# EAGLE board RAUPS_SingleLayer_Stepper (EAGLE 7.2.0)
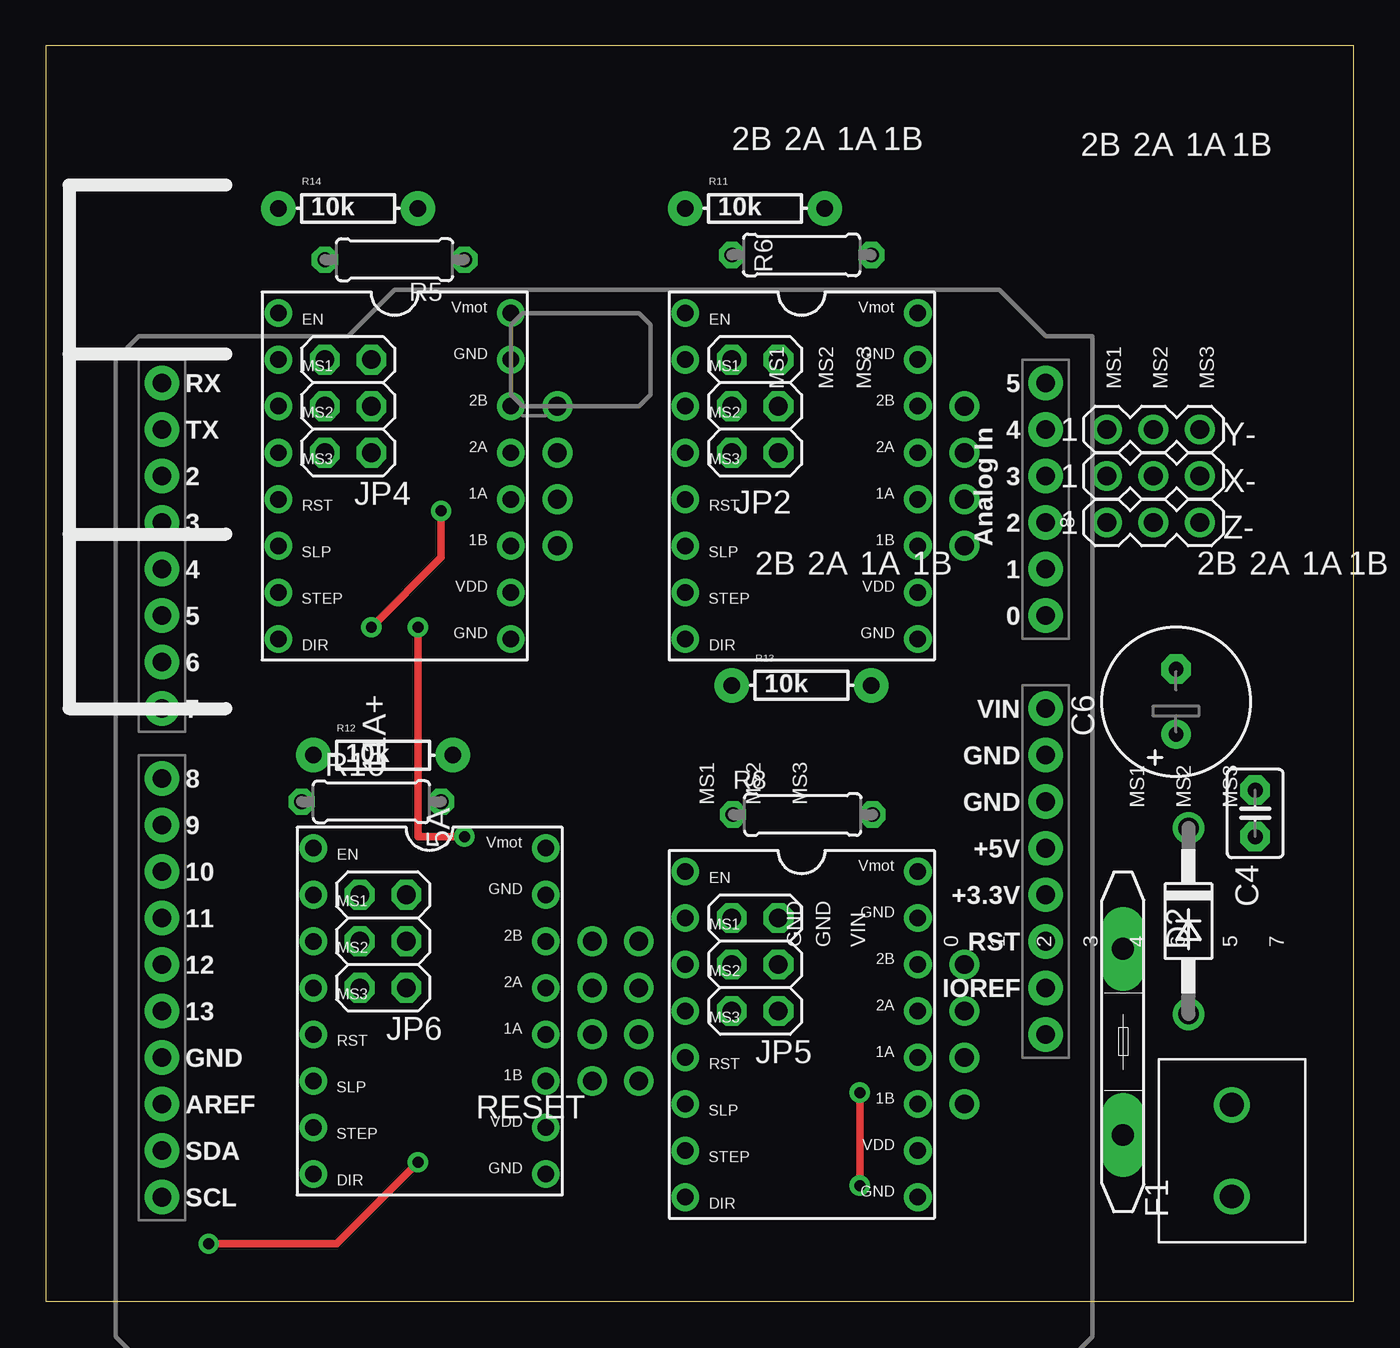
[diagram p0: board, top side]
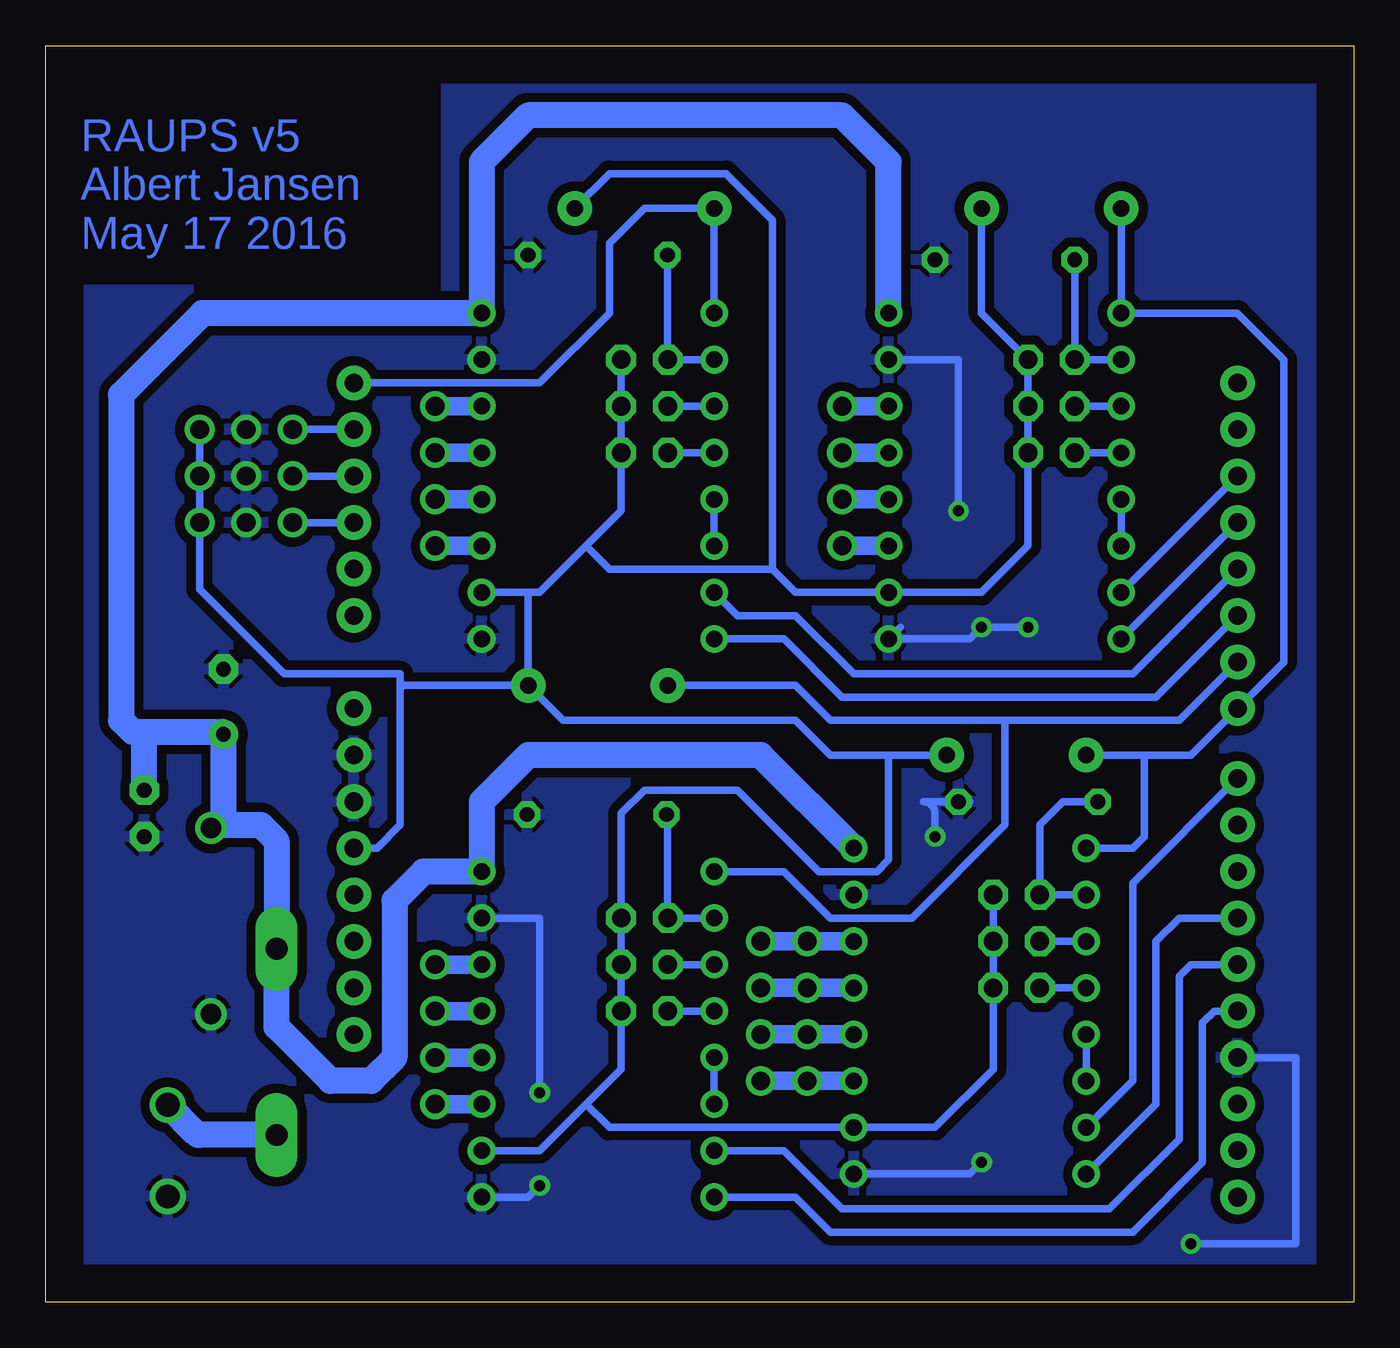
[diagram p1: board, bottom side, seen from below]

Size 71.42 x 68.57 mm. Coordinates in mm from the lower left corner, seen from the top.
Outline: 71.42,0 71.42,68.57 0,68.57 0,0 71.42,0
Copper layers (1*16): Top 0.035mm / dielectric 1.5mm / Bottom 0.035mm
Design rules "Humber Safe DRU": minimum track width 10mil, minimum drill 20mil, track to track 20mil, track to pad 20mil, pad to pad 8mil, via to via 8mil, smd to smd 8mil, copper to edge 80mil, drill to drill 8mil, minimum pad ring 12mil, minimum via ring 10mil, stop-mask expansion 4mil, vias tented up to drill 25mil, thermal gap 10mil
Net classes: 0 default: width 0.406 mm

## Footprints (pad centres in the part's own frame; a part is rotated, then mirrored left to right if it is on the bottom)
C2.5-3 = drill 0.813 pad 1.6 octagon: 1 -1.27,0; 2 1.27,0
E3,5-8 = drill 0.813 pad 1.6: + -1.778,0 | drill 0.813 pad 1.6 octagon: - 1.778,0
DO41-10 = drill 1.118: A 5.08,0; C -5.08,0
1X04 = drill 1.016: 1 -2.54,0; 2 0,0; 3 2.54,0; 4 5.08,0
MFR500 = drill 1.2 pad 2.3 long: 1 -5.08,0; 2 5.08,0
2X03 = drill 1.016 octagon: 1 -2.54,-1.27; 2 -2.54,1.27; 3 0,-1.27; 4 0,1.27; 5 2.54,-1.27; 6 2.54,1.27
0207/7 = drill 0.813 octagon: 1 -3.81,0; 2 3.81,0
AXIAL-0.3 = drill 0.9 pad 1.88: P$1 -3.81,0; P$2 3.81,0
CONN-2PIN = drill 1.3: P$1 -2.5,0; P$2 2.5,0
A4988BREAKOUT = drill 0.9: 1A 8.89,1.27; 1B 11.43,1.27; 2A 6.35,1.27; 2B 3.81,1.27; DIR 16.51,-11.43; EN -1.27,-11.43; GND 16.51,1.27; GND@0 1.27,1.27; MS1 1.27,-11.43; MS2 3.81,-11.43; MS3 6.35,-11.43; RST 8.89,-11.43; SLP 11.43,-11.43; STEP 13.97,-11.43; VDD 13.97,1.27; VMOT -1.27,1.27
UNO_R3_SHIELD = drill 1.016 pad 1.88: 3.3V 50.8,26.67; 5V 50.8,29.21; A0 50.8,41.91; A1 50.8,44.45; A2 50.8,46.99; A3 50.8,49.53; A4 50.8,52.07; A5 50.8,54.61; AREF 2.54,15.24; D2 2.54,49.53; D3 2.54,46.99; D4 2.54,44.45; D5 2.54,41.91; D6 2.54,39.37; D7 2.54,36.83; D8 2.54,33.02; D9 2.54,30.48; D10 2.54,27.94; D11 2.54,25.4; D12 2.54,22.86; D13 2.54,20.32; GND@0 50.8,31.75; GND@1 50.8,34.29; GND@2 2.54,17.78; IOREF 50.8,21.59; NC 50.8,19.05; RES 50.8,24.13; RX 2.54,54.61; SCL 2.54,10.16; SDA 2.54,12.7; TX 2.54,52.07; VIN 50.8,36.83
3PIN-HEADER = drill 1.016: 1 -2.54,0; 2 0,0; 3 2.54,0

## Placement (x,y rotation side)
C4  100nF  [C2.5-3]  66.04,26.67 270 top
C6  470uF  [E3,5-8]  61.72,32.77 90 top
D2  1N4004  [DO41-10]  62.4,20.78 270 top
E0-MOT  [1X04]  50.17,46.36 270 top
F1  MFR500  [MFR500]  58.83,14.19 270 top
JP2  [2X03]  38.73,48.9 270 top
JP4  [2X03]  16.51,48.9 270 top
JP5  [2X03]  38.73,18.41 270 top
JP6  [2X03]  18.41,19.68 270 top
R5  100k  [0207/7]  19.05,56.9 0 top
R6  100k  [0207/7]  41.27,57.15 180 top
R8  100k  [0207/7]  41.34,26.61 0 top
R10  100k  [0207/7]  17.78,27.3 0 top
R11  10k  [AXIAL-0.3]  38.73,59.69 0 top
R12  10k  [AXIAL-0.3]  18.41,29.84 0 top
R13  10k  [AXIAL-0.3]  41.27,33.66 0 top
R14  10k  [AXIAL-0.3]  16.51,59.69 0 top
U$1  2PIN_SOCKET  [CONN-2PIN]  64.77,8.26 270 top
U$4  A4988BREAKOUT  [A4988BREAKOUT]  46.35,52.7 270 top
U$6  A4988BREAKOUT  [A4988BREAKOUT]  24.13,52.7 270 top
U$7  A4988BREAKOUT  [A4988BREAKOUT]  46.35,22.23 270 top
U$8  A4988BREAKOUT  [A4988BREAKOUT]  26.04,23.5 270 top
U$11  ARDUINO_R3_SHIELD  [UNO_R3_SHIELD]  3.81,-4.45 0 top
X-  [3PIN-HEADER]  60.48,45.09 0 top
X-MOT  [1X04]  27.94,46.35 270 top
Y-  [3PIN-HEADER]  60.48,47.62 0 top
Y-MOT  [1X04]  50.16,15.88 270 top
Z-  [3PIN-HEADER]  60.48,42.55 0 top
Z-MOT  [1X04]  32.38,17.14 270 top
Z-MOT1  [1X04]  29.84,17.14 270 top

## Library data of the parts
C4 = capacitor-wima
C6 R5 R6 R8 R10 = adafruit
D2 = diode
E0-MOT F1 U$4 U$6-U$8 X-MOT Y-MOT Z-MOT Z-MOT1 = RepRapjr
JP2 JP4-JP6 = pinhead
R11-R14 = SparkFun-Resistors; PROD_ID: RES-12183
U$1 = ControllerCard
U$11 = SparkFun-Boards
X- Y- Z- = ultimachine

## Nets
+12V: C4.1 C6.+ D2.C F1.1 U$4.VMOT U$6.VMOT U$7.VMOT U$8.VMOT
D9: U$11.D10
D10: U$11.D9
E0-DIR: U$4.DIR U$11.D5
E0-EN: R11.P$1 U$4.EN U$11.A5
E0-STEP: U$4.STEP U$11.D4
GND: C4.2 C6.- D2.A R5.2 R6.1 R8.2 R10.2 U$1.P$2 U$4.GND U$4.GND@0 U$6.GND U$6.GND@0 U$7.GND U$7.GND@0 U$8.GND U$8.GND@0 U$11.GND@0 U$11.GND@1 U$11.GND@2 X-.2 Y-.2 Z-.2
N$3: E0-MOT.1 U$4.2B
N$4: E0-MOT.2 U$4.2A
N$5: JP2.1 R6.2 U$4.MS1
N$6: JP2.5 U$4.MS3
N$8: U$4.RST U$4.SLP
N$9: JP2.3 U$4.MS2
N$10: E0-MOT.3 U$4.1A
N$11: E0-MOT.4 U$4.1B
N$12: U$11.IOREF
N$14: JP4.1 R5.1 U$6.MS1
N$15: JP4.3 U$6.MS2
N$16: U$11.VIN
N$17: JP5.3 U$7.MS2
N$19: JP4.5 U$6.MS3
N$20: U$6.RST U$6.SLP
N$21: U$6.2B X-MOT.1
N$22: U$6.2A X-MOT.2
N$23: U$7.RST U$7.SLP
N$24: U$11.3.3V
N$25: U$11.AREF
N$26: U$6.1A X-MOT.3
N$27: U$6.1B X-MOT.4
N$28: U$7.2B Y-MOT.1
N$29: U$7.2A Y-MOT.2
N$30: U$7.1A Y-MOT.3
N$31: JP5.5 U$7.MS3
N$32: F1.2 U$1.P$1
N$33: JP5.1 R8.1 U$7.MS1
N$36: U$7.1B Y-MOT.4
N$37: JP6.3 U$8.MS2
N$38: U$8.RST U$8.SLP
N$39: JP6.5 U$8.MS3
N$40: JP6.1 R10.1 U$8.MS1
N$41: U$8.2B Z-MOT1.1 Z-MOT.1
N$42: U$8.2A Z-MOT1.2 Z-MOT.2
N$43: U$8.1A Z-MOT1.3 Z-MOT.3
N$44: U$8.1B Z-MOT1.4 Z-MOT.4
RESET: U$11.RES
THERM0: U$11.A1
THERM1: U$11.A0
VCC: JP2.2 JP2.4 JP2.6 JP4.2 JP4.4 JP4.6 JP5.2 JP5.4 JP5.6 JP6.2 JP6.4 JP6.6 R11.P$2 R12.P$2 R13.P$2 R14.P$2 U$4.VDD U$6.VDD U$7.VDD U$8.VDD U$11.5V X-.3 Y-.3 Z-.3
X-DIR: U$6.DIR U$11.D3
X-EN: R12.P$1 R14.P$1 U$6.EN U$8.EN U$11.D7
X-MIN: U$11.A3 X-.1
X-STEP: U$6.STEP U$11.D2
Y-DIR: U$7.DIR U$11.D13
Y-EN: R13.P$1 U$7.EN U$11.D6
Y-MIN: U$11.A4 Y-.1
Y-STEP: U$7.STEP U$11.D12
Z-DIR: U$8.DIR U$11.D11
Z-MIN: U$11.A2 Z-.1
Z-STEP: U$8.STEP U$11.D8

## Tracks (layer width: path | path; a pad name or v marks a point on that pad's centre or on a via)
+12V
  Bottom 1.422: U$6.VMOT 25.4,62.23 27.94,64.77 45.09,64.77 47.62,62.23 U$4.VMOT 62.87,53.98 67.31,49.53 67.31,31.75 66.67,31.11 66.04,31.11 | D2.C 62.23,26.04 | 62.23,26.04 59.69,26.04 58.83,25.17 F1.1 58.83,15.01 55.88,12.06 53.66,12.06 52.39,13.34 52.39,21.91 50.8,23.5 U$7.VMOT 47.62,27.3 45.09,29.84 32.38,29.84 U$8.VMOT | 66.04,31.11 61.85,31.11 arc90 C6.+ 61.72,26.54 62.23,26.04 | C4.1 66.04,31.11
E0-DIR
  Bottom 0.406: U$11.D5 10.79,33.02 27.94,33.02 31.11,36.2 U$4.DIR
E0-EN
  Bottom 0.406: U$4.EN R11.P$1 38.73,59.69 40.64,57.78 40.64,53.98 44.45,50.16 U$11.A5
E0-STEP
  Bottom 0.406: U$11.D4 12.06,34.29 27.3,34.29 30.48,37.47 33.66,37.47 U$4.STEP
GND  (via drill 0.6)
  Top 0.406: v17.78,36.83 21.59,40.64 v21.59,43.18 | v20.32,7.62 15.88,3.17 v8.89,3.17 | v44.45,11.43 v44.45,6.35 | v22.86,25.4 20.32,25.4 v20.32,36.83
  Bottom 0.406: 20.95,27.3 R10.2 23.5,27.3 arc90 22.86,26.67 v22.86,25.4 | 24.77,36.83 U$6.GND 20.95,36.2 v20.32,36.83 v17.78,36.83 | v21.59,43.18 21.59,51.44 U$6.GND@0 | U$8.GND 20.95,6.99 v20.32,7.62 | v8.89,3.17 3.17,3.17 3.17,13.34 U$11.GND@2 | U$7.GND@0 44.45,20.95 v44.45,11.43 | v44.45,6.35 45.09,5.71 U$7.GND
  pour Bottom: 1.27,1.27 69.85,1.27 69.85,55.24 49.53,55.24 49.53,67.31 1.27,67.31
N$3
  Bottom 1.016: E0-MOT.1 | E0-MOT.1 U$4.2B
N$4
  Bottom 1.016: E0-MOT.2 | E0-MOT.2 U$4.2A
N$5
  Bottom 0.406: U$4.MS1 JP2.1 | R6.2 JP2.1 | JP2.1
N$6
  Bottom 0.406: U$4.MS3 JP2.5
N$8
  Bottom 0.406: U$4.RST U$4.SLP
N$9
  Bottom 0.406: U$4.MS2 JP2.3
N$10
  Bottom 1.016: E0-MOT.3 | E0-MOT.3 U$4.1A
N$11
  Bottom 1.016: E0-MOT.4 | E0-MOT.4 U$4.1B
N$14
  Bottom 0.406: U$6.MS1 JP4.1 | JP4.1 | R5.1 JP4.1
N$15
  Bottom 0.406: U$6.MS2 JP4.3 | JP4.3
N$17
  Bottom 0.406: U$7.MS2 JP5.3
N$19
  Bottom 0.406: U$6.MS3 JP4.5 | JP4.5
N$20
  Bottom 0.406: U$6.RST U$6.SLP
N$21
  Bottom 1.016: X-MOT.1 | X-MOT.1 U$6.2B
N$22
  Bottom 1.016: X-MOT.2 | X-MOT.2 U$6.2A
N$23
  Bottom 0.406: U$7.RST U$7.SLP
N$26
  Bottom 1.016: X-MOT.3 | X-MOT.3 U$6.1A
N$27
  Bottom 1.016: X-MOT.4 | X-MOT.4 U$6.1B
N$28
  Bottom 1.016: Y-MOT.1 U$7.2B
N$29
  Bottom 1.016: Y-MOT.2 U$7.2A
N$30
  Bottom 1.016: Y-MOT.3 U$7.1A
N$31
  Bottom 0.406: U$7.MS3 JP5.5
N$32
  Bottom 1.422: F1.2 63.02,9.11 arc45 63.2,9.19 U$1.P$1
N$33
  Bottom 0.406: U$7.MS1 JP5.1 37.47,26.61 R8.1
N$36
  Bottom 1.016: Y-MOT.4 U$7.1B
N$37
  Bottom 0.406: U$8.MS2 JP6.3
N$38
  Bottom 0.406: U$8.RST U$8.SLP
N$39
  Bottom 0.406: U$8.MS3 JP6.5
N$40
  Bottom 0.406: U$8.MS1 JP6.1 17.14,26.04 15.88,27.3 R10.1
N$41
  Bottom 1.016: Z-MOT.1 Z-MOT1.1 U$8.2B
N$42
  Bottom 1.016: Z-MOT.2 Z-MOT1.2 U$8.2A
N$43
  Bottom 1.016: Z-MOT.3 Z-MOT1.3 U$8.1A
N$44
  Bottom 1.016: Z-MOT.4 Z-MOT1.4 U$8.1B
VCC
  Bottom 0.406: JP2.2 JP2.4 JP2.6 40.01,43.18 41.91,41.27 | 45.09,38.73 44.45,38.73 41.91,41.27 | 45.09,38.73 U$4.VDD | Y-.3 X-.3 Z-.3 63.02,38.89 58.42,34.29 52.07,34.29 52.07,33.4 | 41.91,10.79 40.01,12.7 JP5.6 JP5.4 JP5.2 40.01,26.67 38.73,27.94 33.66,27.94 29.21,23.5 26.04,23.5 25.4,24.13 25.4,29.84 | 41.91,10.79 44.45,8.26 U$7.VDD | 31.75,40.01 40.64,40.01 41.91,41.27 | 41.91,10.79 40.64,9.53 U$8.VDD 22.86,9.53 19.68,12.7 JP6.6 JP6.4 JP6.2 | 52.07,33.4 52.07,26.04 53.34,24.77 U$11.5V | R11.P$2 40.64,61.59 34.29,61.59 31.75,59.05 31.75,40.01 | R13.P$2 45.09,38.73 | R14.P$2 20.32,53.98 JP4.2 JP4.4 JP4.6 17.78,41.27 20.32,38.73 U$6.VDD 30.48,38.73 31.75,40.01 | R12.P$2 25.4,29.84 | 25.4,29.84 28.57,29.84 30.48,31.75 43.18,31.75 R13.P$2 | 52.07,33.4 arc90 51.82,33.66 R13.P$2
X-DIR
  Bottom 0.406: U$11.D3 | U$11.D3 U$6.DIR
X-EN
  Bottom 0.406: R14.P$1 U$6.EN 6.35,53.98 3.81,51.44 3.81,34.92 U$11.D7 8.89,29.84 11.43,29.84 | R12.P$1 11.43,29.84 | U$8.EN 12.06,24.77 11.43,25.4 11.43,29.84
X-MIN
  Bottom 0.406: U$11.A3 X-.1
X-STEP
  Bottom 0.406: U$11.D2 | U$11.D2 U$6.STEP
Y-DIR
  Bottom 0.406: U$11.D13 7.62,15.88 8.26,15.24 8.26,7.62 12.06,3.81 28.57,3.81 30.48,5.71 U$7.DIR
Y-EN
  Bottom 0.406: U$11.D6 9.53,31.75 19.05,31.75 | 19.05,31.75 28.57,31.75 30.48,33.66 R13.P$1 | 19.05,31.75 19.05,26.04 24.13,20.95 28.57,20.95 31.11,23.5 U$7.EN
Y-MIN
  Bottom 0.406: U$11.A4 Y-.1
Y-STEP
  Bottom 0.406: U$7.STEP 31.11,8.26 27.94,5.08 13.34,5.08 9.53,8.89 9.53,17.78 8.89,18.41 U$11.D12
Z-DIR
  Bottom 0.406: U$8.DIR 10.79,10.79 10.79,19.68 9.53,20.95 U$11.D11
Z-MIN
  Bottom 0.406: U$11.A2 Z-.1
Z-STEP
  Bottom 0.406: U$8.STEP 12.06,12.06 12.06,22.86 U$11.D8

## Text on the board
Bottom: RAUPS v5 / Albert Jansen / May 17 2016
tNames: 2B | 2A | 1A | 1B | 2B | 2A | 1A | 1B | MS1 | MS2 | MS3 | MS1 | MS2 | MS3 | 8 | 2B | 2A | 1A | 1B | 2B | 2A | 1A | 1B | 11A+ | MS1 | MS2 | MS3 | MS1 | MS2 | MS3 | 5A | GND | GND | GND | VIN | 0 | 1 | 2 | 3 | 4 | 6 | 5 | 7 | RESET
Document: 12-35V Out | - | D10 | + | - | D9 | + | - | D11 | + | 12-35VDC In | + | 11A | - | + | 5A | -